# EAGLE board CT_schematic (EAGLE 7.6.0)

Size 100 x 80 mm. Coordinates in mm from the lower left corner, seen from the top.
Outline: 0,0 100,0 100,80 0,80 0,0
Copper layers (1*16): Top 0.035mm / dielectric 1.5mm / Bottom 0.035mm
Design rules "default": minimum track width 10mil, minimum drill 24mil, track to track 8mil, track to pad 8mil, pad to pad 8mil, via to via 8mil, smd to smd 8mil, copper to edge 40mil, drill to drill 8mil, minimum pad ring 10mil, minimum via ring 8mil, stop-mask expansion 4mil, vias tented up to drill 0mil, thermal gap 10mil

## Footprints (pad centres in the part's own frame; a part is rotated, then mirrored left to right if it is on the bottom)
C0603 = smd 0.8 x 0.8: 1 -0.762,0; 2 0.762,0
C0402 = smd 0.5 x 0.5: 1 -0.508,0; 2 0.508,0
C0805 = smd 1.2 x 1.3: 1 -1.016,0; 2 1.016,0
C1210 = smd 1.2 x 2.5: 1 -1.524,0; 2 1.524,0
C1206 = smd 1.3 x 1.6: 1 -1.524,0; 2 1.524,0
L0603 = smd 0.8 x 0.8: 1 -0.762,0; 2 0.762,0
L1210 = smd 1.2 x 2.5: 1 -1.524,0; 2 1.524,0
DR1040 = smd 1.6 x 3.2: 1 -4.458,0; 2 4.458,0
R0603 = smd 0.8 x 0.8: 1 -0.762,0; 2 0.762,0
LQFP144 = smd 0.35 x 1.35: 1 -8.75,-10.625; 2 -8.25,-10.625; 3 -7.75,-10.625; 4 -7.25,-10.625; 5 -6.75,-10.625; 6 -6.25,-10.625; 7 -5.75,-10.625; 8 -5.25,-10.625; 9 -4.75,-10.625; 10 -4.25,-10.625; 11 -3.75,-10.625; 12 -3.25,-10.625; 13 -2.75,-10.62; 14 -2.25,-10.625; 15 -1.75,-10.625; 16 -1.25,-10.625; 17 -0.75,-10.625; 18 -0.25,-10.625; 19 0.25,-10.625; 20 0.75,-10.625; 21 1.25,-10.625; 22 1.75,-10.625; 23 2.25,-10.625; 24 2.75,-10.62; 25 3.25,-10.625; 26 3.75,-10.625; 27 4.25,-10.625; 28 4.75,-10.625; 29 5.25,-10.625; 30 5.75,-10.625; 31 6.25,-10.625; 32 6.75,-10.625; 33 7.25,-10.625; 34 7.75,-10.625; 35 8.25,-10.625; 36 8.75,-10.625; 73 8.75,10.625; 74 8.25,10.625; 75 7.75,10.625; 76 7.25,10.625; 77 6.75,10.625; 78 6.25,10.625; 79 5.75,10.625; 80 5.25,10.625; 81 4.75,10.625; 82 4.25,10.625; 83 3.75,10.625; 84 3.25,10.625; 85 2.75,10.625; 86 2.25,10.625; 87 1.75,10.625; 88 1.25,10.625; 89 0.75,10.625; 90 0.25,10.625; 91 -0.25,10.625; 92 -0.75,10.625; 93 -1.25,10.625; 94 -1.75,10.625; 95 -2.25,10.625; 96 -2.75,10.625; 97 -3.25,10.625; 98 -3.75,10.625; 99 -4.25,10.625; 100 -4.75,10.625; 101 -5.25,10.625; 102 -5.75,10.625; 103 -6.25,10.625; 104 -6.75,10.625; 105 -7.25,10.625; 106 -7.75,10.625; 107 -8.25,10.625; 108 -8.75,10.625 | smd 1.35 x 0.35: 37 10.625,-8.75; 38 10.625,-8.25; 39 10.625,-7.75; 40 10.625,-7.25; 41 10.625,-6.75; 42 10.625,-6.25; 43 10.625,-5.75; 44 10.625,-5.25; 45 10.625,-4.75; 46 10.625,-4.25; 47 10.625,-3.75; 48 10.625,-3.25; 49 10.625,-2.75; 50 10.625,-2.25; 51 10.625,-1.75; 52 10.625,-1.25; 53 10.625,-0.75; 54 10.625,-0.25; 55 10.625,0.25; 56 10.625,0.75; 57 10.625,1.25; 58 10.625,1.75; 59 10.625,2.25; 60 10.625,2.75; 61 10.625,3.25; 62 10.625,3.75; 63 10.625,4.25; 64 10.625,4.75; 65 10.625,5.25; 66 10.625,5.75; 67 10.625,6.25; 68 10.625,6.75; 69 10.625,7.25; 70 10.625,7.75; 71 10.625,8.25; 72 10.625,8.75; 109 -10.625,8.75; 110 -10.625,8.25; 111 -10.625,7.75; 112 -10.625,7.25; 113 -10.625,6.75; 114 -10.625,6.25; 115 -10.625,5.75; 116 -10.625,5.25; 117 -10.625,4.75; 118 -10.625,4.25; 119 -10.625,3.75; 120 -10.625,3.25; 121 -10.625,2.75; 122 -10.625,2.25; 123 -10.625,1.75; 124 -10.625,1.25; 125 -10.625,0.75; 126 -10.625,0.25; 127 -10.625,-0.25; 128 -10.625,-0.75; 129 -10.625,-1.25; 130 -10.625,-1.75; 131 -10.625,-2.25; 132 -10.625,-2.75; 133 -10.625,-3.25; 134 -10.625,-3.75; 135 -10.625,-4.25; 136 -10.625,-4.75; 137 -10.625,-5.25; 138 -10.625,-5.75; 139 -10.625,-6.25; 140 -10.625,-6.75; 141 -10.625,-7.25; 142 -10.625,-7.75; 143 -10.625,-8.25; 144 -10.625,-8.75
VFBGA48 = smd 0.35 x 0.35: A1 -1.875,2.625; A2 -1.125,2.625; A3 -0.375,2.625; A4 0.375,2.625; A5 1.125,2.625; A6 1.875,2.625; B1 -1.875,1.875; B2 -1.125,1.875; B3 -0.375,1.875; B4 0.375,1.875; B5 1.125,1.875; B6 1.875,1.875; C1 -1.875,1.125; C2 -1.125,1.125; C3 -0.375,1.125; C4 0.375,1.125; C5 1.125,1.125; C6 1.875,1.125; D1 -1.875,0.375; D2 -1.125,0.375; D3 -0.375,0.375; D4 0.375,0.375; D5 1.125,0.375; D6 1.875,0.375; E1 -1.875,-0.375; E2 -1.125,-0.375; E3 -0.375,-0.375; E4 0.375,-0.375; E5 1.125,-0.375; E6 1.875,-0.375; F1 -1.875,-1.125; F2 -1.125,-1.125; F3 -0.375,-1.125; F4 0.375,-1.125; F5 1.125,-1.125; F6 1.875,-1.125; G1 -1.875,-1.875; G2 -1.125,-1.875; G3 -0.375,-1.875; G4 0.375,-1.875; G5 1.125,-1.875; G6 1.875,-1.875; H1 -1.875,-2.625; H2 -1.125,-2.625; H3 -0.375,-2.625; H4 0.375,-2.625; H5 1.125,-2.625; H6 1.875,-2.625
SSOP-20 = smd 1.651 x 0.432: 1 -3.48,2.925; 2 -3.48,2.275; 3 -3.48,1.625; 4 -3.48,0.975; 5 -3.48,0.325; 6 -3.48,-0.325; 7 -3.48,-0.975; 8 -3.48,-1.625; 9 -3.48,-2.275; 10 -3.48,-2.925; 11 3.48,-2.925; 12 3.48,-2.275; 13 3.48,-1.625; 14 3.48,-0.975; 15 3.48,-0.325; 16 3.48,0.325; 17 3.48,0.975; 18 3.48,1.625; 19 3.48,2.275; 20 3.48,2.925
182-009-MALE = drill 1.194 pad 1.524 octagon: 1 -5.537,10.923; 2 -2.769,10.923; 3 0,10.923; 4 2.769,10.923; 5 5.537,10.923; 6 -4.153,8.08; 7 -1.384,8.08; 8 1.384,8.08; 9 4.153,8.08 | hole 3.048: -12.446,9.501; 12.446,9.501
SOIC-8 = smd 1.6 x 0.6: 1 -2.7,1.905 | smd 1.55 x 0.6: 2 -2.7,0.635; 3 -2.7,-0.635; 4 -2.7,-1.905; 5 2.7,-1.905; 6 2.7,-0.635; 7 2.7,0.635; 8 2.7,1.905
TSSOP20-I = smd 0.4 x 1.35: 1 -2.925,-2.875; 2 -2.275,-2.875; 3 -1.625,-2.875; 4 -0.975,-2.875; 5 -0.325,-2.875; 6 0.325,-2.875; 7 0.975,-2.875; 8 1.625,-2.875; 9 2.275,-2.875; 10 2.925,-2.875; 11 2.925,2.875; 12 2.275,2.875; 13 1.625,2.875; 14 0.975,2.875; 15 0.325,2.875; 16 -0.325,2.875; 17 -0.975,2.875; 18 -1.625,2.875; 19 -2.275,2.875; 20 -2.925,2.875
HTSS-105-01-G-D = drill 1 pad 1.8 square: 1 0,0 | drill 1 pad 1.8: 2 0,2.54; 3 2.54,0; 4 2.54,2.54; 5 5.08,0; 6 5.08,2.54; 7 7.62,0; 8 7.62,2.54; 9 10.16,0; 10 10.16,2.54
FCI_10118193-0001LF = smd 0.4 x 1.35: 1 -1.3,2.675; 2 -0.65,2.675; 3 0,2.675; 4 0.65,2.675; 5 1.3,2.675 | smd 1.6 x 1.4: 6 -3.2,2.45; 7 3.2,2.45 | smd 1.9 x 1.9: 8 -1.2,0; 9 1.2,0 | hole 0.5: -3.3,0; 3.3,0
SOT143B = smd 1 x 0.7: 1 -0.75,-1 | smd 0.6 x 0.7: 2 0.95,-1; 3 0.95,1; 4 -0.95,1
ABS07-32.768KHZ-7-T = smd 1.1 x 2.4: 1 -2.5,0; 2 0,0
ASFL1 = smd 1.7 x 1.5: 1 -1.27,-1.1; 2 1.27,-1.1; 3 1.27,1.1; 4 -1.27,1.1
TSOT-23-5 = smd 1.3 x 0.62: 1 -1.31,0.95; 2 -1.31,0; 3 -1.31,-0.95; 4 1.31,-0.95; 5 1.31,0.95
DFN-8_DDB = smd 0.805 x 0.3: 1 -0.952,0.75; 2 -0.952,0.25; 3 -0.952,-0.25; 4 -0.952,-0.75; 5 0.952,-0.75; 6 0.952,-0.25; 7 0.952,0.25; 8 0.952,0.75 | smd 0.61 x 2.2: 9 0,0
DFN8_2X3MC = smd 0.813 x 0.305: 1 -1.398,0.75; 2 -1.398,0.25; 3 -1.398,-0.25; 4 -1.398,-0.75; 5 1.398,-0.75; 6 1.398,-0.25; 7 1.398,0.25; 8 1.398,0.75 | smd 1.753 x 1.549: 9 0,0
JST-2-SMD = smd 1 x 4.6: 1 -1,-3.7; 2 1,-3.7 | smd 1.6 x 3.4: NC1 -3.4,1.5; NC2 3.4,1.5
SON-6 = smd 0.55 x 0.3: 1 -0.355,0.5 | smd 0.52 x 0.3: 2 -0.37,0; 3 -0.37,-0.5; 4 0.37,-0.5; 5 0.37,0; 6 0.37,0.5
SW_4-1437565-2 = smd 1.4 x 2.1: 1 -2.23,4.55; 2 -2.23,-4.55; 3 2.23,4.55; 4 2.23,-4.55
LGM67K-G1J2-24-Z = smd 0.8 x 1.4: A -2,0; C 0,0
NC7SZ125M5X = smd 1.3 x 0.7: 1 -1.3,0.95; 2 -1.3,0; 3 -1.3,-0.95; 4 1.3,-0.95; 5 1.3,0.95

## Placement (x,y rotation side)
C1  1e-06  [C0603]  -67.31,82.55 0 top  (outside the outline)
C2  1e-07  [C0603]  -71.12,82.55 0 top  (outside the outline)
C3  1e-07  [C0603]  -74.93,82.55 0 top  (outside the outline)
C4  1e-07  [C0603]  -78.74,82.55 0 top  (outside the outline)
C5  1e-07  [C0603]  -82.55,82.55 0 top  (outside the outline)
C6  1e-07  [C0603]  -86.36,82.55 0 top  (outside the outline)
C7  1e-07  [C0603]  -15.24,87.63 0 top  (outside the outline)
C8  1e-07  [C0603]  -19.05,87.63 0 top  (outside the outline)
C9  1e-07  [C0603]  -22.86,87.63 0 top  (outside the outline)
C10  1e-07  [C0603]  -26.67,87.63 0 top  (outside the outline)
C11  1e-07  [C0603]  -30.48,87.63 0 top  (outside the outline)
C12  1e-07  [C0603]  -34.29,87.63 0 top  (outside the outline)
C13  1e-07  [C0603]  -38.1,87.63 0 top  (outside the outline)
C14  4.7e-06  [C0603]  -44.45,82.55 0 top  (outside the outline)
C15  2.2e-06  [C0603]  -48.26,82.55 0 top  (outside the outline)
C16  2.2e-06  [C0603]  -52.07,82.55 0 top  (outside the outline)
C17  1e-08  [C0603]  -41.91,87.63 0 top  (outside the outline)
C18  1e-06  [C0603]  -45.72,87.63 0 top  (outside the outline)
C19  1e-07  [C0603]  -49.53,87.63 0 top  (outside the outline)
C20  1e-07  [C0402]  -22.86,92.71 0 top  (outside the outline)
C21  1e-11  [C0402]  -26.67,92.71 0 top  (outside the outline)
C22  1e-11  [C0402]  -30.48,92.71 0 top  (outside the outline)
C23  1e-06  [C0603]  -53.34,87.63 0 top  (outside the outline)
C24  1e-07  [C0402]  -34.29,92.71 0 top  (outside the outline)
C25  2.2e-06  [C0603]  -55.88,82.55 0 top  (outside the outline)
C26  1e-06  [C0603]  -57.15,87.63 0 top  (outside the outline)
C27  1e-06  [C0603]  -60.96,87.63 0 top  (outside the outline)
C28  1e-06  [C0603]  -64.77,87.63 0 top  (outside the outline)
C29  4.7e-06  [C0805]  -85.09,69.85 0 top  (outside the outline)
C30  1e-06  [C0603]  -68.58,87.63 0 top  (outside the outline)
C31  1e-06  [C0603]  -72.39,87.63 0 top  (outside the outline)
C32  1e-07  [C0402]  -38.1,92.71 0 top  (outside the outline)
C33  1e-07  [C0402]  -41.91,92.71 0 top  (outside the outline)
C34  1e-07  [C0402]  -45.72,92.71 0 top  (outside the outline)
C35  1e-07  [C0402]  -49.53,92.71 0 top  (outside the outline)
C36  1e-07  [C0402]  -53.34,92.71 0 top  (outside the outline)
C37  1e-07  [C0402]  -57.15,92.71 0 top  (outside the outline)
C38  1e-08  [C0402]  -60.96,92.71 0 top  (outside the outline)
C39  1e-05  [C0805]  -15.24,77.47 0 top  (outside the outline)
C40  1e-05  [C0805]  -20.32,77.47 0 top  (outside the outline)
C41  1e-05  [C1210]  -48.26,69.85 0 top  (outside the outline)
C42  2.2e-06  [C0603]  -59.69,82.55 0 top  (outside the outline)
C43  2.2e-07  [C0603]  -63.5,82.55 0 top  (outside the outline)
C44  1e-07  [C0402]  -64.77,92.71 0 top  (outside the outline)
C45  1e-05  [C1206]  -67.31,69.85 0 top  (outside the outline)
C46  1e-05  [C1206]  -73.66,69.85 0 top  (outside the outline)
C47  1e-08  [C0402]  -68.58,92.71 0 top  (outside the outline)
F1  240.0  [L0603]  -76.2,87.63 0 top  (outside the outline)
I1  1.5e-05  [L1210]  -54.61,69.85 0 top  (outside the outline)
I2  3.8e-06  [DR1040]  -53.34,50.8 0 top  (outside the outline)
I3  1e-05  [L1210]  -60.96,69.85 0 top  (outside the outline)
R2  1000.0  [R0603]  -80.01,87.63 0 top  (outside the outline)
R4  4700.0  [R0603]  -83.82,87.63 0 top  (outside the outline)
R5  10000.0  [R0603]  -78.74,77.47 0 top  (outside the outline)
R6  10000.0  [R0603]  -83.82,77.47 0 top  (outside the outline)
R7  10000.0  [R0603]  -15.24,82.55 0 top  (outside the outline)
R8  10000.0  [R0603]  -20.32,82.55 0 top  (outside the outline)
R9  10000.0  [R0603]  -25.4,82.55 0 top  (outside the outline)
R10  100000.0  [R0603]  -38.1,77.47 0 top  (outside the outline)
R11  100000.0  [R0603]  -43.18,77.47 0 top  (outside the outline)
R12  100000.0  [R0603]  -48.26,77.47 0 top  (outside the outline)
R13  120.0  [R0603]  -87.63,87.63 0 top  (outside the outline)
R14  220000.0  [R0603]  -53.34,77.47 0 top  (outside the outline)
R15  1000000.0  [R0603]  -33.02,77.47 0 top  (outside the outline)
R16  100000.0  [R0603]  -58.42,77.47 0 top  (outside the outline)
R17  560000.0  [R0603]  -63.5,77.47 0 top  (outside the outline)
R18  10000.0  [R0603]  -30.48,82.55 0 top  (outside the outline)
R19  10000.0  [R0603]  -35.56,82.55 0 top  (outside the outline)
R20  9100.0  [R0603]  -15.24,92.71 0 top  (outside the outline)
R21  680000.0  [R0603]  -68.58,77.47 0 top  (outside the outline)
R22  120000.0  [R0603]  -73.66,77.47 0 top  (outside the outline)
R23  2000.0  [R0603]  -19.05,92.71 0 top  (outside the outline)
R24  10000.0  [R0603]  -40.64,82.55 0 top  (outside the outline)
U1  STM32F412ZET6  [LQFP144]  -24.13,11.43 0 top  (outside the outline)
U2  CY62147GE30-45BVXI  [VFBGA48]  -68.58,29.21 0 top  (outside the outline)
U3  MAX3218EAP+T  [SSOP-20]  -50.8,60.96 0 top  (outside the outline)
U4  182-009-113R531  [182-009-MALE]  -59.69,6.35 0 top  (outside the outline)
U5  MCP2562-E/SN  [SOIC-8]  -40.64,62.23 0 top  (outside the outline)
U6  182-009-113R531  [182-009-MALE]  -36.83,29.21 0 top  (outside the outline)
U7  SP3203ECY-L/TR  [TSSOP20-I]  -43.18,50.8 0 top  (outside the outline)
U8  HTSS-105-01-G-D  [HTSS-105-01-G-D]  -27.94,60.96 0 top  (outside the outline)
U9  10118193-0001LF  [FCI_10118193-0001LF]  -78.74,60.96 0 top  (outside the outline)
U10  prtr5v0u2ax  [SOT143B]  -87.63,92.71 0 top  (outside the outline)
U11  ABS07-32.768KHZ-7-T  [ABS07-32.768KHZ-7-T]  -27.94,71.12 0 top  (outside the outline)
U12  ASFL1-25MHZ-NCS  [ASFL1]  -69.85,60.96 0 top  (outside the outline)
U13  ltc3406es5  [TSOT-23-5]  -25.4,76.2 0 top  (outside the outline)
U14  LT3494AEDDB#TRMPBF  [DFN-8_DDB]  -72.39,92.71 0 top  (outside the outline)
U15  MCP73831T-2ACI/MC  [DFN8_2X3MC]  -20.32,96.52 0 top  (outside the outline)
U16  S2B-PH-SM4-TB(LF)(SN)  [JST-2-SMD]  -68.58,52.07 0 top  (outside the outline)
U17  TPS3895ADRYR  [SON-6]  -13.97,96.52 0 top  (outside the outline)
U18  4-1437565-2  [SW_4-1437565-2]  -27.94,50.8 0 top  (outside the outline)
U19  Q65110A2395  [LGM67K-G1J2-24-Z]  -36.83,71.12 0 top  (outside the outline)
U20  nc7sz125m5x  [NC7SZ125M5X]  -78.74,68.58 0 top  (outside the outline)

## Library data of the parts
C1-C47 F1 I1-I3 R2 R4-R24 U1-U20 = circuit_tree

## Nets
CLK_CRYSTAL_U1_8: C21.1 U1.8 U11.1
CLK_CRYSTAL_U1_9: C22.1 U1.9 U11.2
CLK_U1_23: U1.23 U12.3
GND: C1.2 C2.2 C3.2 C4.2 C5.2 C6.2 C7.2 C8.2 C9.2 C10.2 C11.2 C12.2 C13.2 C14.2 C15.2 C16.2 C17.2 C18.2 C19.2 C20.2 C21.2 C22.2 C23.2 C24.2 C25.2 C26.2 C27.2 C28.2 C30.2 C31.2 C32.2 C33.2 C36.2 C37.2 C38.2 C39.2 C40.1 C40.2 C41.2 C42.2 C43.2 C44.2 C45.2 C46.2 C47.2 R2.2 R5.2 R6.2 R14.2 R20.2 R22.2 R23.2 U1.16 U1.31 U1.38 U1.51 U1.61 U1.83 U1.94 U1.103 U1.107 U1.120 U1.130 U2.D1 U2.E6 U3.5 U3.17 U3.20 U4.5 U5.2 U5.8 U6.5 U7.18 U8.9 U9.5 U9.6 U9.7 U9.8 U9.9 U10.1 U12.2 U13.2 U14.2 U14.9 U15.6 U15.9 U16.2 U17.2 U19.C U20.1 U20.3
INPUT_USBPOWER_5V: C23.1 C45.1 R24.2 U1.101 U9.1 U10.4 U15.1 U15.2
NET_U1_25: R4.1 U1.25 U20.4
NET_U1_33: C17.1 C18.1 F1.1 U1.32 U1.33
NET_U1_71: C15.1 U1.71
NET_U1_106: C16.1 U1.106
NET_U1_138: R5.1 U1.138
NET_U1_140: U19.A
NET_U1_142: U18.3 U18.4
NET_U1_143: R6.1 U1.143
NET_U3_1: I1.1 U3.1
NET_U3_2: R10.1 U3.2
NET_U3_3: R11.1 U3.3
NET_U3_4: R12.1 U3.4
NET_U3_15: C28.1 U3.15
NET_U3_16: C29.2 U3.16
NET_U3_18: C29.1 U3.18
NET_U3_19: C27.1 U3.19
NET_U4_2: U3.12 U4.2
NET_U4_3: U3.14 U4.3
NET_U4_7: U3.11 U4.7
NET_U4_8: U3.13 U4.8
NET_U5_6: R13.2 U5.6
NET_U6_2: R13.2 U5.6 U6.2
NET_U6_3: R13.1 U5.7 U6.3
NET_U7_1: C34.1 U7.1
NET_U7_2: C36.1 U7.2
NET_U7_3: C34.2 U7.3
NET_U7_4: C35.1 U7.4
NET_U7_5: C35.2 U7.5
NET_U7_6: C37.1 U7.6
NET_U7_20: U7.20
NET_U8_3: U7.14 U8.3
NET_U8_4: U7.13 U8.4
NET_U8_5: U7.17 U8.5
NET_U8_6: U7.16 U8.6
NET_U13_1: U13.1
NET_U13_3: I2.1 U13.3
NET_U13_5: R14.1 R15.1 U13.5
NET_U13_ATNET_3: I2.2 R15.2
NET_U14_1: I3.1 U14.1
NET_U14_5: R16.1 U14.5
NET_U14_6: R17.1 U14.6
NET_U14_8: C43.1 U14.8
NET_U15_5: R24.1 U15.5
NET_U15_8: R23.1 U15.8
NET_U17_1: R19.1 R20.1 U17.1
NET_U17_3: R21.2 R22.1 U17.3
NET_U17_4: R18.1 U17.4 U20.2
NET_U18_1: R2.1 U18.1 U18.2
PROC_CAN1_RX: U1.114 U5.4
PROC_CAN1_TX: U1.115 U5.1
PROC_FSMC_A0: U1.10 U2.A3
PROC_FSMC_A1: U1.11 U2.A4
PROC_FSMC_A2: U1.12 U2.A5
PROC_FSMC_A3: U1.13 U2.B3
PROC_FSMC_A4: U1.14 U2.B4
PROC_FSMC_A5: U1.15 U2.C3
PROC_FSMC_A6: U1.50 U2.C4
PROC_FSMC_A7: U1.53 U2.D4
PROC_FSMC_A8: U1.54 U2.H2
PROC_FSMC_A9: U1.55 U2.H3
PROC_FSMC_A10: U1.56 U2.H4
PROC_FSMC_A11: U1.57 U2.H5
PROC_FSMC_A12: U1.87 U2.G3
PROC_FSMC_A13: U1.88 U2.G4
PROC_FSMC_A14: U1.89 U2.F3
PROC_FSMC_A15: U1.90 U2.F4
PROC_FSMC_A16: U1.80 U2.E4
PROC_FSMC_A17: U1.81 U2.D3
PROC_FSMC_D0: U1.85 U2.B6
PROC_FSMC_D1: U1.86 U2.C5
PROC_FSMC_D2: U1.112 U2.C6
PROC_FSMC_D3: U1.113 U2.D5
PROC_FSMC_D4: U1.36 U2.E5
PROC_FSMC_D5: U1.37 U2.F5
PROC_FSMC_D6: U1.40 U2.F6
PROC_FSMC_D7: U1.41 U2.G6
PROC_FSMC_D8: U1.64 U2.B1
PROC_FSMC_D9: U1.65 U2.C1
PROC_FSMC_D10: U1.66 U2.C2
PROC_FSMC_D11: U1.67 U2.D2
PROC_FSMC_D12: U1.68 U2.E2
PROC_FSMC_D13: U1.73 U2.F2
PROC_FSMC_D14: U1.78 U2.F1
PROC_FSMC_D15: U1.79 U2.G1
PROC_FSMC_NBL0: U1.141 U2.A1
PROC_FSMC_NE4: R8.1 U1.44 U2.B5
PROC_FSMC_NOE: R7.1 U1.45 U2.A2
PROC_FSMC_NWE: R9.1 U1.28 U2.G5
PROC_USART2_CTS: U1.34 U3.8
PROC_USART2_RTS: U1.35 U3.10
PROC_USART2_RX: U1.122 U3.9
PROC_USART2_TX: U1.119 U3.7
PROC_USART3_CTS: U1.74 U7.8
PROC_USART3_RTS: U1.75 U7.10
PROC_USART3_RX: U1.70 U7.11
PROC_USART3_TX: U1.69 U7.7
PROC_USB_OTG_FS_DM: U1.103 U9.2 U10.3
PROC_USB_OTG_FS_DP: U1.104 U9.3 U10.2
VCC_S1_3V7: C39.1 C41.1 C46.1 I3.2 R16.2 U13.4 U14.3 U14.4 U15.3 U15.4 U16.1
VCC_TIER1_3V3: C1.1 C2.1 C3.1 C4.1 C5.1 C6.1 C7.1 C8.1 C9.1 C10.1 C11.1 C12.1 C13.1 C14.1 C19.1 C20.1 C24.1 C25.1 C26.1 C31.1 C32.1 C33.1 C38.1 C40.2 C44.1 C47.1 F1.2 I1.2 I2.2 R4.2 R7.2 R8.2 R9.2 R10.2 R11.2 R12.2 R15.2 R18.2 R19.2 R21.1 U1.6 U1.17 U1.30 U1.39 U1.52 U1.62 U1.72 U1.84 U1.95 U1.108 U1.121 U1.131 U1.144 U2.D6 U2.E1 U3.6 U5.5 U7.12 U7.19 U12.4 U17.6 U20.5
VCC_TIER1_5V0: C30.1 C42.1 R17.2 U5.3 U14.7

## Tracks (layer width: path | path; a pad name or v marks a point on that pad's centre or on a via)
CLK_CRYSTAL_U1_8  (2 unrouted)
CLK_CRYSTAL_U1_9  (2 unrouted)
CLK_U1_23  (1 unrouted)
GND  (90 unrouted)
INPUT_USBPOWER_5V  (7 unrouted)
NET_U1_25  (2 unrouted)
NET_U1_33  (4 unrouted)
NET_U1_71  (1 unrouted)
NET_U1_106  (1 unrouted)
NET_U1_138  (1 unrouted)
NET_U1_142  (1 unrouted)
NET_U1_143  (1 unrouted)
NET_U3_1  (1 unrouted)
NET_U3_2  (1 unrouted)
NET_U3_3  (1 unrouted)
NET_U3_4  (1 unrouted)
NET_U3_15  (1 unrouted)
NET_U3_16  (1 unrouted)
NET_U3_18  (1 unrouted)
NET_U3_19  (1 unrouted)
NET_U4_2  (1 unrouted)
NET_U4_3  (1 unrouted)
NET_U4_7  (1 unrouted)
NET_U4_8  (1 unrouted)
NET_U5_6  (1 unrouted)
NET_U6_2  (2 unrouted)
NET_U6_3  (2 unrouted)
NET_U7_1  (1 unrouted)
NET_U7_2  (1 unrouted)
NET_U7_3  (1 unrouted)
NET_U7_4  (1 unrouted)
NET_U7_5  (1 unrouted)
NET_U7_6  (1 unrouted)
NET_U8_3  (1 unrouted)
NET_U8_4  (1 unrouted)
NET_U8_5  (1 unrouted)
NET_U8_6  (1 unrouted)
NET_U13_3  (1 unrouted)
NET_U13_5  (2 unrouted)
NET_U13_ATNET_3  (1 unrouted)
NET_U14_1  (1 unrouted)
NET_U14_5  (1 unrouted)
NET_U14_6  (1 unrouted)
NET_U14_8  (1 unrouted)
NET_U15_5  (1 unrouted)
NET_U15_8  (1 unrouted)
NET_U17_1  (2 unrouted)
NET_U17_3  (2 unrouted)
NET_U17_4  (2 unrouted)
NET_U18_1  (2 unrouted)
PROC_CAN1_RX  (1 unrouted)
PROC_CAN1_TX  (1 unrouted)
PROC_FSMC_A0  (1 unrouted)
PROC_FSMC_A1  (1 unrouted)
PROC_FSMC_A2  (1 unrouted)
PROC_FSMC_A3  (1 unrouted)
PROC_FSMC_A4  (1 unrouted)
PROC_FSMC_A5  (1 unrouted)
PROC_FSMC_A6  (1 unrouted)
PROC_FSMC_A7  (1 unrouted)
PROC_FSMC_A8  (1 unrouted)
PROC_FSMC_A9  (1 unrouted)
PROC_FSMC_A10  (1 unrouted)
PROC_FSMC_A11  (1 unrouted)
PROC_FSMC_A12  (1 unrouted)
PROC_FSMC_A13  (1 unrouted)
PROC_FSMC_A14  (1 unrouted)
PROC_FSMC_A15  (1 unrouted)
PROC_FSMC_A16  (1 unrouted)
PROC_FSMC_A17  (1 unrouted)
PROC_FSMC_D0  (1 unrouted)
PROC_FSMC_D1  (1 unrouted)
PROC_FSMC_D2  (1 unrouted)
PROC_FSMC_D3  (1 unrouted)
PROC_FSMC_D4  (1 unrouted)
PROC_FSMC_D5  (1 unrouted)
PROC_FSMC_D6  (1 unrouted)
PROC_FSMC_D7  (1 unrouted)
PROC_FSMC_D8  (1 unrouted)
PROC_FSMC_D9  (1 unrouted)
PROC_FSMC_D10  (1 unrouted)
PROC_FSMC_D11  (1 unrouted)
PROC_FSMC_D12  (1 unrouted)
PROC_FSMC_D13  (1 unrouted)
PROC_FSMC_D14  (1 unrouted)
PROC_FSMC_D15  (1 unrouted)
PROC_FSMC_NBL0  (1 unrouted)
PROC_FSMC_NE4  (2 unrouted)
PROC_FSMC_NOE  (2 unrouted)
PROC_FSMC_NWE  (2 unrouted)
PROC_USART2_CTS  (1 unrouted)
PROC_USART2_RTS  (1 unrouted)
PROC_USART2_RX  (1 unrouted)
PROC_USART2_TX  (1 unrouted)
PROC_USART3_CTS  (1 unrouted)
PROC_USART3_RTS  (1 unrouted)
PROC_USART3_RX  (1 unrouted)
PROC_USART3_TX  (1 unrouted)
PROC_USB_OTG_FS_DM  (2 unrouted)
PROC_USB_OTG_FS_DP  (2 unrouted)
VCC_S1_3V7  (10 unrouted)
VCC_TIER1_3V3  (61 unrouted)
VCC_TIER1_5V0  (4 unrouted)